# Altium PCB PCB1.PcbDoc
Units mm, origin at the board's own origin, x right, y up, seen from the top; angles counter-clockwise.
Board outline 16.59 x 23.45 mm, 2 copper layers (Top Layer, Bottom Layer); 11 components, 9 nets, 86 pads, 9 vias.
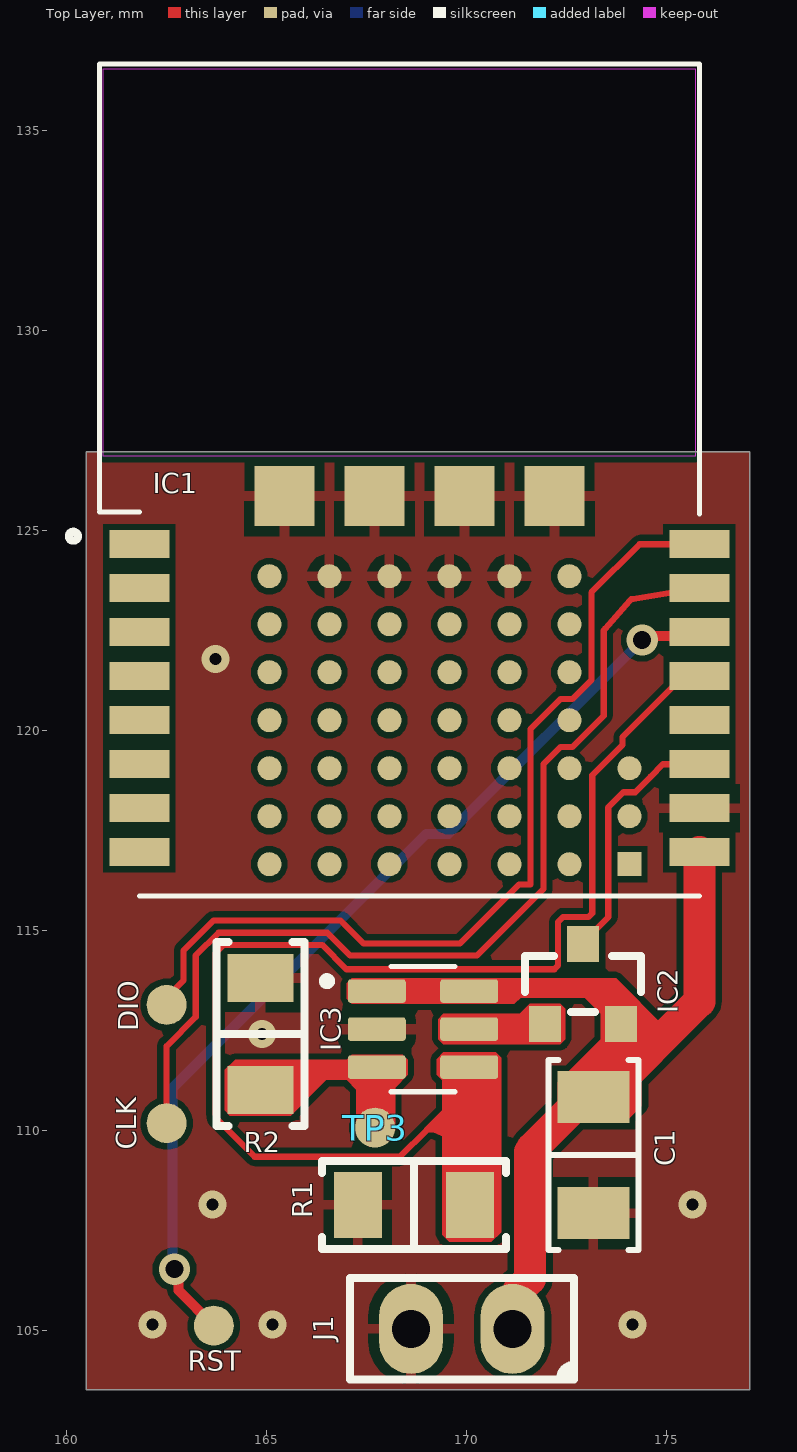
[diagram p0: Top Layer view]
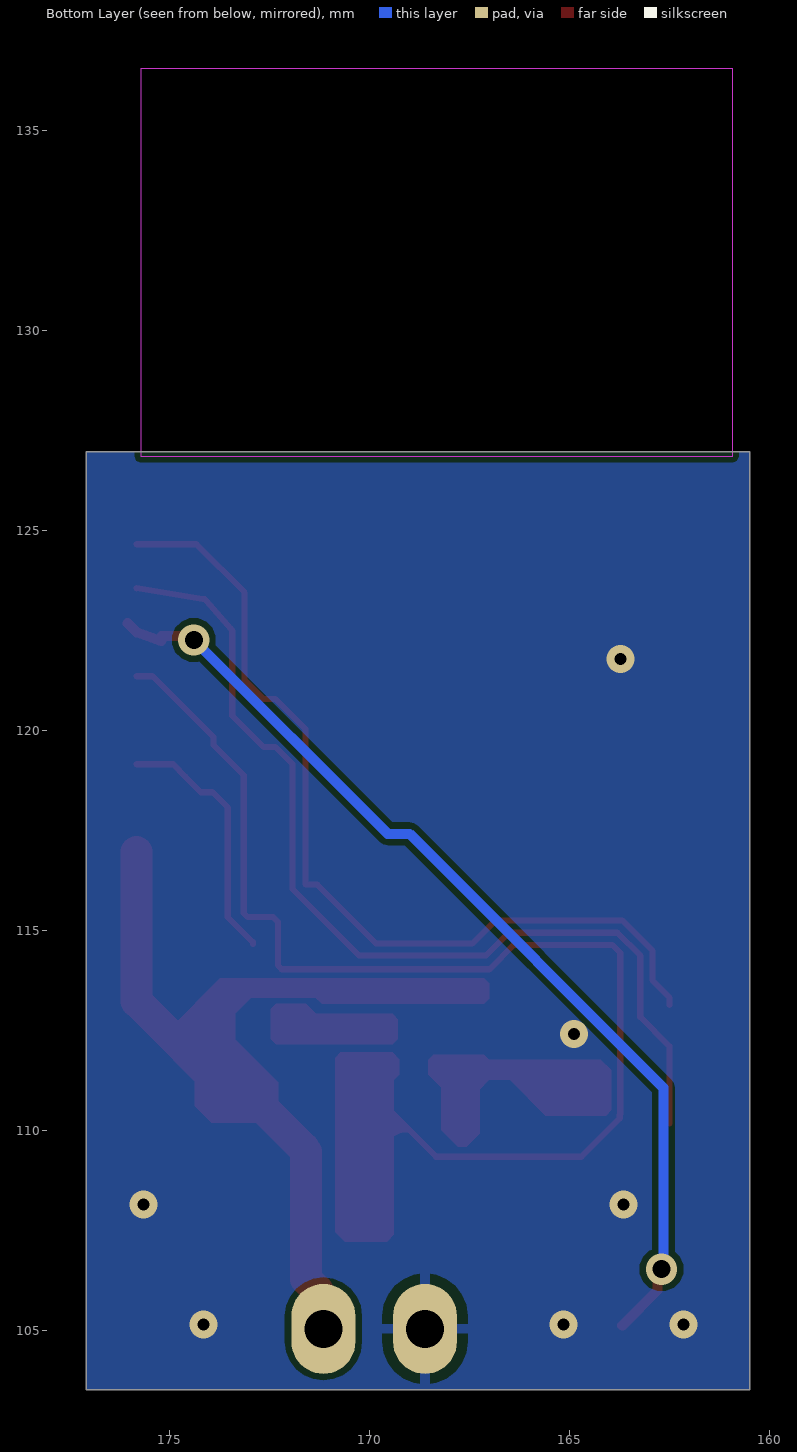
[diagram p1: Bottom Layer view, seen from below]

## Layer stack, top to bottom
Top Solder: solder mask 0.0102, Solder Resist, Dk 3.5
Top Layer: signal copper 0.0356
Dielectric 1: dielectric 0.32, FR-4, Dk 4.8
Bottom Layer: signal copper 0.0356
Bottom Solder: solder mask 0.0102, Solder Resist, Dk 3.5

## Board outline
160.49,103.52 160.49,126.97 177.08,126.97 177.08,103.52

## Design rules (kind name [scope] priority, off if disabled: settings)
Clearance [All] p1: gap=0.152 ignorepadtopadclearanceinfootprint=FALSE except(0: Arc-Hole Track-Hole SMDPad-Hole THPad-Hole Via-Hole Fill-Hole Poly-Hole Region-Hole Text-Hole)
PolygonConnect [All] p1: connectstyle=Relief reliefconductorwidth=0.254 reliefentries=4 polygonreliefangle="90 Angle" airgapwidth=0.254
RoutingVias [All] p1: holewidth=0.5 width=1 viastyle="Through Hole" minholewidth=0.125 minwidth=0.25 maxholewidth=5 maxwidth=10
SolderMaskExpansion [All] p1: expansion=0.102 istentingtop=FALSE
Width [All] p1: maxlimit=5 minlimit=0.152 preferedwidth=0.5 minimp=50.000000 maximp=50.000000 favimp=50.000000
30 further rules are at their usual default settings.

## Components (designator, comment, footprint, x,y, rotation, side; value= is the part's Value field where it differs from the comment)
C1 "47 µF" "CAP 1206_3216 - 0.8MM" 173.17,109.38 r90 top
CLK "TEST PAD" TEST_PAD 162.5,110.18 r0 top (schematic designator TP1)
DIO "TEST PAD" TEST_PAD 162.5,113.14 r0 top (schematic designator TP2)
IC1 "BT480F" BT840F 168.319,126.256 r0 top
IC2 "ZXMP6A13FTA" "DIODES SOT-23-3" 172.913,113.659 r90 top
IC3 "TPL5111DDCT" SOT-23-THN-6 168.91,112.532 r0 top
J1 "SSW-102-03-T-S" "SAMTEC SSW-102-03-T-S" 169.88,105.04 r180 top
R1 "1 MOhms" "RES 1206_3216" 168.68,108.14 r0 top
R2 "82 kOhms" "RES 1206_3216" 164.846,112.408 r270 top
RST "TEST PAD" TEST_PAD 163.68,105.12 r90 top (schematic designator TP4)
TP3 "TEST PAD" TEST_PAD 167.71,110.07 r90 top

## Footprints (in the part's own frame and the unit in brackets; to place one, negate y for a bottom-side part, rotate by r counter-clockwise, add the part's x,y. Pads: shape width x height; smd on the part's side, far side on the other; paste and mask are expansions set on the pad)
BT840F [mm]
  rect 1.5x0.7 smd: 1(-6.5,-1.6) 2(-6.5,-2.7) 3(-6.5,-3.8) 4(-6.5,-4.9) 5(-6.5,-6) 6(-6.5,-7.1) 7(-6.5,-8.2) 8(-6.5,-9.3) 9(7.5,-9.3) 10(7.5,-8.2) 11(7.5,-7.1) 12(7.5,-6) 13(7.5,-4.9) 14(7.5,-3.8) 15(7.5,-2.7) 16(7.5,-1.6)
  round 0.6 smd: A0(-1.75,-2.4) A1(-1.75,-3.6) A2(-1.75,-4.8) A3(-1.75,-6) A4(-1.75,-7.2) A5(-1.75,-8.4) A6(-1.75,-9.6) B0(-0.25,-2.4) B1(-0.25,-3.6) B2(-0.25,-4.8) B3(-0.25,-6) B4(-0.25,-7.2) B5(-0.25,-8.4) B6(-0.25,-9.6) C0(1.25,-2.4) C1(1.25,-3.6) C2(1.25,-4.8) C3(1.25,-6) C4(1.25,-7.2) C5(1.25,-8.4) C6(1.25,-9.6) D0(2.75,-2.4) D1(2.75,-3.6) D2(2.75,-4.8) D3(2.75,-6) D4(2.75,-7.2) D5(2.75,-8.4) D6(2.75,-9.6) E0(4.25,-2.4) E1(4.25,-3.6) E2(4.25,-4.8) E3(4.25,-6) E4(4.25,-7.2) E5(4.25,-8.4) E6(4.25,-9.6) F4(5.75,-7.2) F5(5.75,-8.4) Z0(-3.25,-2.4) Z1(-3.25,-3.6) Z2(-3.25,-4.8) Z3(-3.25,-6) Z4(-3.25,-7.2) Z5(-3.25,-8.4) Z6(-3.25,-9.6)
  rect 1.5x1.5 smd: F0(-2.87,-0.4) F1(-0.62,-0.4) F2(1.63,-0.4) F3(3.88,-0.4)
  rect 0.6x0.6 smd: F6(5.75,-9.6)
  Keep-Out Layer region: 7.4,0.6 -7.4,0.6 -7.4,10.29 7.4,10.29
  Keep-Out Layer region: 7.4,0.6 -7.4,0.6 -7.4,10.29 7.4,10.29
  Keep-Out Layer region: 7.4,0.6 -7.4,0.6 -7.4,10.29 7.4,10.29
  silkscreen extent -8.26,-10.4 7.5,10.4, body extent -7.5,-10.4 7.5,10.4, height 1.9
"CAP 1206_3216 - 0.8MM" [mm] "Chip Capacitor, 2-Leads, Body 3.25x1.60mm, IPC Medium Density"
  rect 1.3x1.8 smd: 1(-1.45,0) 2(1.45,0)
  silkscreen extent -2.37,-1.12 2.37,1.12, body extent -1.6,-0.8 1.6,0.8, height 0.8
"DIODES SOT-23-3" [mm] "SOT23, 3-Leads, Body 2.90x2.40mm, Pitch 0.95mm, IPC Medium Density"
  rect 0.9x0.8 smd: 1(-1,0.95) 2(-1,-0.95) 3(1,0)
  silkscreen extent -0.7,-1.45 0.7,1.45, body extent -1.41,-1.45 1.41,1.45, height 1.5
"RES 1206_3216" [mm] "Chip Resistor, 2-Leads, Body 3.13x1.55mm, IPC Medium Density"
  rect 1.2x1.65 smd: 1(-1.4,0) 2(1.4,0)
  silkscreen extent -2.3,-1.1 2.3,1.1, body extent -1.6,-0.8 1.6,0.8, height 0.6
"SAMTEC SSW-102-03-T-S" [mm]
  oval 1.6x2.25 hole 0.95: 1(-1.27,0) 2(1.27,0)
  silkscreen extent -2.8,-1.27 2.8,1.27, body extent -2.79,-1.21 2.79,1.21, height 8.51
SOT-23-THN-6 [mm]
  rrect25% 1.45x0.59 smd: 1(-1.155,0.95) 2(-1.155,0) 3(-1.155,-0.95) 4(1.155,-0.95) 5(1.155,0) 6(1.155,0.95)
  silkscreen extent -2.5,-1.57 0.8,1.57, body extent -1.4,-1.45 1.4,1.45, height 1.1
TEST_PAD [mm]
  round 1 smd paste-1: 1(0,0)

## Part data
C1: library part GRM31CR61A476ME15L, "CAP CER 47UF 10V X5R 1206", Device Package="1206 (3216 Metric)", Manufacturer="Murata Electronics", Operating Temperature="-55°C ~ 85°C", Supplier Part Number 1=490-5528-1-ND, Temperature Coefficient=X5R, Tolerance=±20%, Voltage - Rated=10V, Applications="General Purpose", Capacitance="47 µF", ComponentLink1Description=Datasheet, ComponentLink1URL=https://www.murata.com/~/media/webrenewal/support/library/catalog/products/capacitor/mlcc/c02e.ashx?la=en-us, ComponentLink2Description="DigiKey Link", ComponentLink2URL=https://www.digikey.com/en/products/detail/murata-electronics/GRM31CR61A476ME15L/2334879, LastUpdated="1.09.2022 12:38:50", Lifecycle Status=Active, Minimum Order=1, Mounting Type="Surface Mount, MLCC", Package / Case="1206 (3216 Metric)", Packaging=TapeAndReel, Part Number=GRM31CR61A476ME15L, Part Status=Active, partid=22110, Price=0.10, Series=GRM, Size / Dimension="0.126\" L x 0.063\" W (3.20mm x 1.60mm)", Supplier 1=DigiKey, Thickness (Max)="0.071\" (1.80mm)"
IC1: library part BT840F, "BLE 5 Module: Nordic nRF52840 SoC (Range 930 Meters)", Case/Package=SMD/SMT, Frequency=2.4GHz, Manufacturer=Fanstel, Max Operating Temperature=85°C, Min Operating Temperature=-40°C, Supplier Part Number 1=1914-1019-1-ND, Category="RF Receivers, Transceivers", ComponentLink1Description=http://www.fanstel.com/s/BlueNor_BT840F_datasheets.pdf?src-supplier=Digi-Key, ComponentLink1URL=http://www.fanstel.com/s/BlueNor_BT840F_datasheets.pdf?src-supplier=Digi-Key, Data Rate=12Mbps, Designed by="Semih AŞÇI", Manufacturer Part Number=BT840F, Memory Size=256KB, Mount="Surface Mount", Packaging="Tape and Reel", Pricing 1="1=14,04000, 10=12,70700, 25=11,70400, 100=10,70080, 250=10,03200, 500=9,36320 (USD)", RoHS=No, Sensitivity=-96dBm, Supplier 1=Digi-Key, Interface=SPI,USB
IC2: "MOSFET P-CH 60V 0.9A SOT23-3", Current - Continuous Drain (Id) @ 25°C="900mA (Ta)", Drain to Source Voltage (Vdss)=60V, Drive Voltage (Max Rds On,  Min Rds On)="4.5V, 10V", Manufacturer="Diodes Incorporated", Operating Temperature="-55°C ~ 150°C (TJ)", Package / Case="TO-236-3, SC-59, SOT-23-3", Power Dissipation (Max)="625mW (Ta)", Supplier Device Package=SOT-23-3, Supplier Part Number 1=ZXMP6A13FCT-ND, Input Capacitance (Ciss) (Max) @ Vds="219pF @ 30V", ComponentLink1Description=Datasheet, ComponentLink1URL=https://www.diodes.com/assets/Datasheets/ZXMP6A13F.pdf, ComponentLink2Description="DigiKey Link", ComponentLink2URL=http://digikey.com/product-detail/en/diodes-incorporated/ZXMP6A13FTA/ZXMP6A13FCT-ND/560665, FET Type=P-Channel, Gate Charge (Qg) (Max) @ Vgs="5.9nC @ 10V", LastUpdated="1.09.2022 13:23:38", Lifecycle Status=Active, Minimum Order=1, Mounting Type="Surface Mount", Packaging=TapeAndReel, Part Number=ZXMP6A13FTA, Part Status=Active, Price=0.19, Rds On (Max) @ Id, Vgs="400mOhm @ 900mA, 10V", Series=-, Supplier 1=DigiKey, Technology="MOSFET (Metal Oxide)", Vgs (Max)=±20V, Vgs(th) (Max) @ Id="3V @ 250µA"
IC3: library part TPL5111, "Ultra low power system timer (35 nA) for power gating in duty cycled applications 6-SOT-23-THIN -40 to 105", Case/Package=SOT-23-6, Manufacturer="Texas Instruments", Max Operating Temperature=105°C, Max Supply Voltage=5.5V, Min Operating Temperature=-40°C, Min Supply Voltage=1.8V, Operating Supply Current=35nA, Supplier Part Number 1=296-42621-6-ND, Category="Real Time Clocks", ComponentLink1Description=http://www.ti.com/general/docs/lit/getliterature.tsp?genericPartNumber=TPL5111&amp;&amp;fileType=pdf&src-supplier=Farnell, ComponentLink1URL=http://www.ti.com/general/docs/lit/getliterature.tsp?genericPartNumber=TPL5111&amp;&amp;fileType=pdf&src-supplier=Farnell, ComponentLink2Description=http://www.ti.com/general/docs/lit/getliterature.tsp?genericPartNumber=TPL5111&&fileType=pdf&src-supplier=Element14, ComponentLink2URL=http://www.ti.com/general/docs/lit/getliterature.tsp?genericPartNumber=TPL5111&&fileType=pdf&src-supplier=Element14, ComponentLink3Description=http://www.ti.com/general/docs/lit/getliterature.tsp?genericPartNumber=TPL5111&&fileType=pdf&src-supplier=Farnell, ComponentLink3URL=http://www.ti.com/general/docs/lit/getliterature.tsp?genericPartNumber=TPL5111&&fileType=pdf&src-supplier=Farnell, ComponentLink4Description=http://www.ti.com/lit/ds/symlink/tpl5111.pdf?src-supplier=Digi-Key, ComponentLink4URL=http://www.ti.com/lit/ds/symlink/tpl5111.pdf?src-supplier=Digi-Key, ComponentLink5Description=http://www.ti.com/general/docs/suppproductinfo.tsp?distId=10&amp;gotoUrl=http%3A%2F%2Fwww.ti.com%2Flit%2Fgpn%2Ftpl5111&src-supplier=Digi-Key, ComponentLink5URL=http://www.ti.com/general/docs/suppproductinfo.tsp?distId=10&amp;gotoUrl=http%3A%2F%2Fwww.ti.com%2Flit%2Fgpn%2Ftpl5111&src-supplier=Digi-Key, Designed by="Semih AŞÇI", Lead Free="Lead Free", Manufacturer Part Number=TPL5111DDCT, Mount="Surface Mount", Number of Pins=6, Packaging="Cut Tape", Pricing 1="1=1,25000, 10=1,11900, 25=1,06240, 100=0,87280 (USD)", Quiescent Current=35nA, REACH SVHC="No SVHC", RoHS=Yes, RoHS Compliant=Yes, Stock 1=9273, Supplier 1=Digi-Key
J1: "CONN RCPT 2POS 0.1 TIN PCB", Current Rating (Amps)="5.7A per Contact", Manufacturer="Samtec Inc.", Material Flammability Rating="UL94 V-0", Operating Temperature="-55°C ~ 105°C", Supplier Part Number 1=SSW-102-03-T-S-ND, Insulation Color=Black, ComponentLink2Description="DigiKey Link", ComponentLink2URL=http://digikey.com/product-detail/en/samtec-inc/SSW-102-03-T-S/SSW-102-03-T-S-ND/7873010, Connector Type=Receptacle, Contact Finish - Mating=Tin, Contact Finish - Post=Tin, Contact Type=Forked, Fastening Type=Push-Pull, LastUpdated="21.06.2022 15:06:02", Lifecycle Status=Active, Minimum Order=1, Mounting Type="Through Hole", Number of Positions=2, Number of Positions Loaded=All, Number of Rows=1, Packaging=Bulk, Part Number=SSW-102-03-T-S, Part Status=Active, Price=0.53, Series=SSW, Style="Board to Board or Cable", Supplier 1=DigiKey, Termination=Solder
R1: library part RCA12061M00FKEA, "RES SMD 1M OHM 1% 1/4W 1206", Device Package="1206 (3216 Metric)", Manufacturer="Vishay Dale", Operating Temperature="-55°C ~ 155°C", Power (Watts)="0.25W, 1/4W", Ratings=AEC-Q200, Supplier Device Package=1206, Supplier Part Number 1=541-2251-1-ND, Temperature Coefficient=±100ppm/°C, Tolerance=±1%, ComponentLink1Description=Datasheet, ComponentLink1URL=http://www.vishay.com/docs/20037/rcae3.pdf, ComponentLink2Description="DigiKey Link", ComponentLink2URL=http://digikey.com/product-detail/en/vishay-dale/RCA12061M00FKEA/541-2251-1-ND/4946904, Composition="Thick Film", Features="Anti-Sulfur, Automotive AEC-Q200", Height - Seated (Max)="0.024\" (0.60mm)", LastUpdated="1.09.2022 12:59:13", Lifecycle Status=Active, Minimum Order=1, Number of Terminations=2, Package / Case="1206 (3216 Metric)", Packaging=TapeAndReel, Part Number=RCA12061M00FKEA, Part Status=Active, partid=28528, Price=0.01, Resistance="1 MOhms", Series=RCA, Size / Dimension="0.126\" L x 0.063\" W (3.20mm x 1.60mm)", Supplier 1=DigiKey
R2: library part CRGP1206F82K, "RES 82K OHM 1% 1/2W 1206", Device Package="1206 (3216 Metric)", Manufacturer="TE Connectivity Passive Product", Operating Temperature="-55°C ~ 155°C", Power (Watts)="0.5W, 1/2W", Supplier Device Package=1206, Supplier Part Number 1=A130561CT-ND, Temperature Coefficient=±100ppm/°C, Tolerance=±1%, ComponentLink1Description=Datasheet, ComponentLink1URL=https://www.te.com/commerce/DocumentDelivery/DDEController?Action=srchrtrv&DocNm=9-1773463-9&DocType=DS&DocLang=English, ComponentLink2Description="DigiKey Link", ComponentLink2URL=https://www.digikey.com/en/products/detail/te-connectivity-passive-product/CRGP1206F82K/8577163, Composition="Thick Film", Features="Pulse Withstanding", Height - Seated (Max)="0.026\" (0.65mm)", LastUpdated="1.09.2022 12:59:15", Lifecycle Status=Active, Minimum Order=1, Number of Terminations=2, Package / Case="1206 (3216 Metric)", Packaging=TapeAndReel, Part Number=CRGP1206F82K, Part Status=Active, partid=27819, Price=0.04, Resistance="82 kOhms", Series=CRGP, Size / Dimension="0.122\" L x 0.061\" W (3.10mm x 1.55mm)", Supplier 1=DigiKey

## Via types
v1: diameter 0.7, hole 0.3, Top Layer to Bottom Layer, tented both sides, 7 vias
v2: diameter 0.78, hole 0.45, Top Layer to Bottom Layer, tented both sides, 2 vias

## Nets (pads, with @x,y where several pads share a name; then routed paths per layer and width w, separated by ;. In a path a pad name is that pad's centre, name@x,y a point inside that pad or via, vN(x,y) a via of type N, cw(c..) or ccw(c..) an arc to the next point about the centre after c; other vN are vias at no path point)
GND: C1.1 IC1.10 IC1.A0 IC1.B0 IC1.C0 IC1.D0 IC1.F0 IC1.F1 IC1.F2 IC1.F3 IC3.2 J1.2 R1.1 R2.1 | length 0.5
  Bottom Layer w0.154: J1.2@168.61,104.82 J1.2@168.61,105.333
  other v1: 162.147,105.147 165.147,105.147 174.147,105.147 163.647,108.147 175.647,108.147 164.88,112.41 163.72,121.79
GPIOX: IC1.13 IC3.4 R1.2 | length 29.3
  Top Layer w0.154: 169.97,110.1 169.89,110.02 169.01,110.02 168.331,109.341 164.699,109.341 163.74,110.3 163.74,110.393 163.728,110.405 163.728,114.439 163.926,114.637 166.39,114.637 166.996,114.031 172.194,114.031 172.284,114.121 172.284,115.204 172.418,115.338 173.05,115.338 173.14,115.428 173.14,118.879 173.896,119.635 173.896,119.833 175.419,121.356 IC1.13
NetIC2_1: IC2.1 IC3.5
NetR2_2: IC3.3 R2.2 TP3.1
NetTP4_1: IC1.14 RST.1 | length 24.7
  Top Layer w0.254: v2(162.7,106.53) 162.801,106.429 162.801,105.999 RST.1 ; v2(174.39,122.26) 174.488,122.358 175.196,122.358 175.196,122.233 IC1.14 IC1.14@176.042,122.679
  Bottom Layer w0.254: v2@162.65,106.51 162.65,111.07 168.995,117.415 169.545,117.415 v2(174.39,122.26) v2@174.359,122.29
SWCLK: CLK.1 IC1.15 | length 24.4
  Top Layer w0.154: CLK.1 162.5,112.109 163.231,112.84 163.231,114.374 163.799,114.943 166.517,114.943 167.09,114.37 170.256,114.37 171.92,116.034 171.92,119.159 172.346,119.585 172.646,119.585 173.428,120.366 173.428,122.501 173.465,122.544 cw(c173.582,122.443) 173.466,122.545 174.077,123.243 174.116,123.282 174.165,123.29 IC1.15
SWDIO: DIO.1 IC1.16 | length 22.7
  Top Layer w0.154: DIO.1 162.5,113.325 162.925,113.749 162.925,114.501 163.673,115.249 166.847,115.249 167.42,114.676 169.837,114.676 171.306,116.145 171.598,116.145 171.598,120.037 172.346,120.785 172.646,120.785 173.122,121.26 173.122,123.452 174.326,124.656 IC1.16
VDD: C1.2 IC1.9 IC2.2 IC3.1 IC3.6 J1.1 | length 14.4
  Top Layer w0.8: J1.1@171.15,104.82 171.303,104.973 171.303,106.003 171.59,106.29 171.59,109.46 171.64,109.51 171.64,109.55 172.92,110.83 C1.2 173.42,110.83 175.819,113.229 IC1.9
WAKEUP: IC1.11 IC2.3 | length 6.4
  Top Layer w0.154: IC2.3 172.913,114.709 173.54,115.336 173.54,118.075 173.921,118.456 174.217,118.456 174.599,118.837 174.599,118.846 174.909,119.156 IC1.11
pads on no net: IC1.1 IC1.2 IC1.3 IC1.4 IC1.5 IC1.6 IC1.7 IC1.8 IC1.12 IC1.A1 IC1.A2 IC1.A3 IC1.A4 IC1.A5 IC1.A6 IC1.B1 IC1.B2 IC1.B3 IC1.B4 IC1.B5 IC1.B6 IC1.C1 IC1.C2 IC1.C3 IC1.C4 IC1.C5 IC1.C6 IC1.D1 IC1.D2 IC1.D3 IC1.D4 IC1.D5 IC1.D6 IC1.E0 IC1.E1 IC1.E2 IC1.E3 IC1.E4 IC1.E5 IC1.E6 IC1.F4 IC1.F5 IC1.F6 IC1.Z0 IC1.Z1 IC1.Z2 IC1.Z3 IC1.Z4 IC1.Z5 IC1.Z6

## Polygon pours and split planes (outlines as drawn)
GND on Bottom Layer "GND_L02_P002" (solid, pour order 2): 177.08,126.97 177.08,103.52 160.49,103.52 160.49,126.97
GND on Top Layer "GND_L01_P000" (solid, pour order 0): 177.08,126.97 177.08,103.52 160.49,103.52 160.49,126.97

## Other copper
Top Layer:
  region net VDD: 171.196,113.167 171.349,113.32 172.948,113.32 173.355,112.913 173.355,112.278 172.28,111.203 172.28,110.34 172.43,110.19 173.95,110.19 174.371,110.611 174.371,111.501 174.88,112.01 174.94,112.01 174.94,112.598 173.736,113.802 167.132,113.802 167.005,113.675 167.005,113.294 167.132,113.167
  region net GPIOX: 169.39,107.39 169.56,107.22 170.62,107.22 170.86,107.46 170.86,111.82 170.73,111.95 169.42,111.95 169.25,111.78 169.25,111.39 169.39,111.25 169.39,110.5 168.941,110.051 169.39,109.852
  region net NetR2_2: 166.998,111.262 167.24,111.02 167.24,109.92 167.57,109.59 167.79,109.59 168.21,110.01 168.21,111.07 168.529,111.389 168.529,111.77 168.402,111.897 167.132,111.897 167.005,111.77 164.211,111.77 163.957,111.516 163.957,110.5 164.084,110.373 165.608,110.373 166.497,111.262
  region net NetIC2_1: 169.291,112.786 169.418,112.913 171.323,112.913 171.577,113.167 172.339,113.167 172.466,113.04 172.466,112.278 172.339,112.151 169.418,112.151 169.291,112.278

## Silkscreen, mask and mechanical layers (free items; w line width, h text height)
Drill Guide:
  the board outline again, w0.127